# Altium PCB backpack.PcbDoc
Units mil, origin at the board's own origin, x right, y up, seen from the top; angles counter-clockwise.
Board outline 5575 x 3600 mil, 2 copper layers (Top Layer, Bottom Layer); 19 components, 19 nets, 108 pads, 3 vias.
Unrouted connection lines stored in the file: 1.
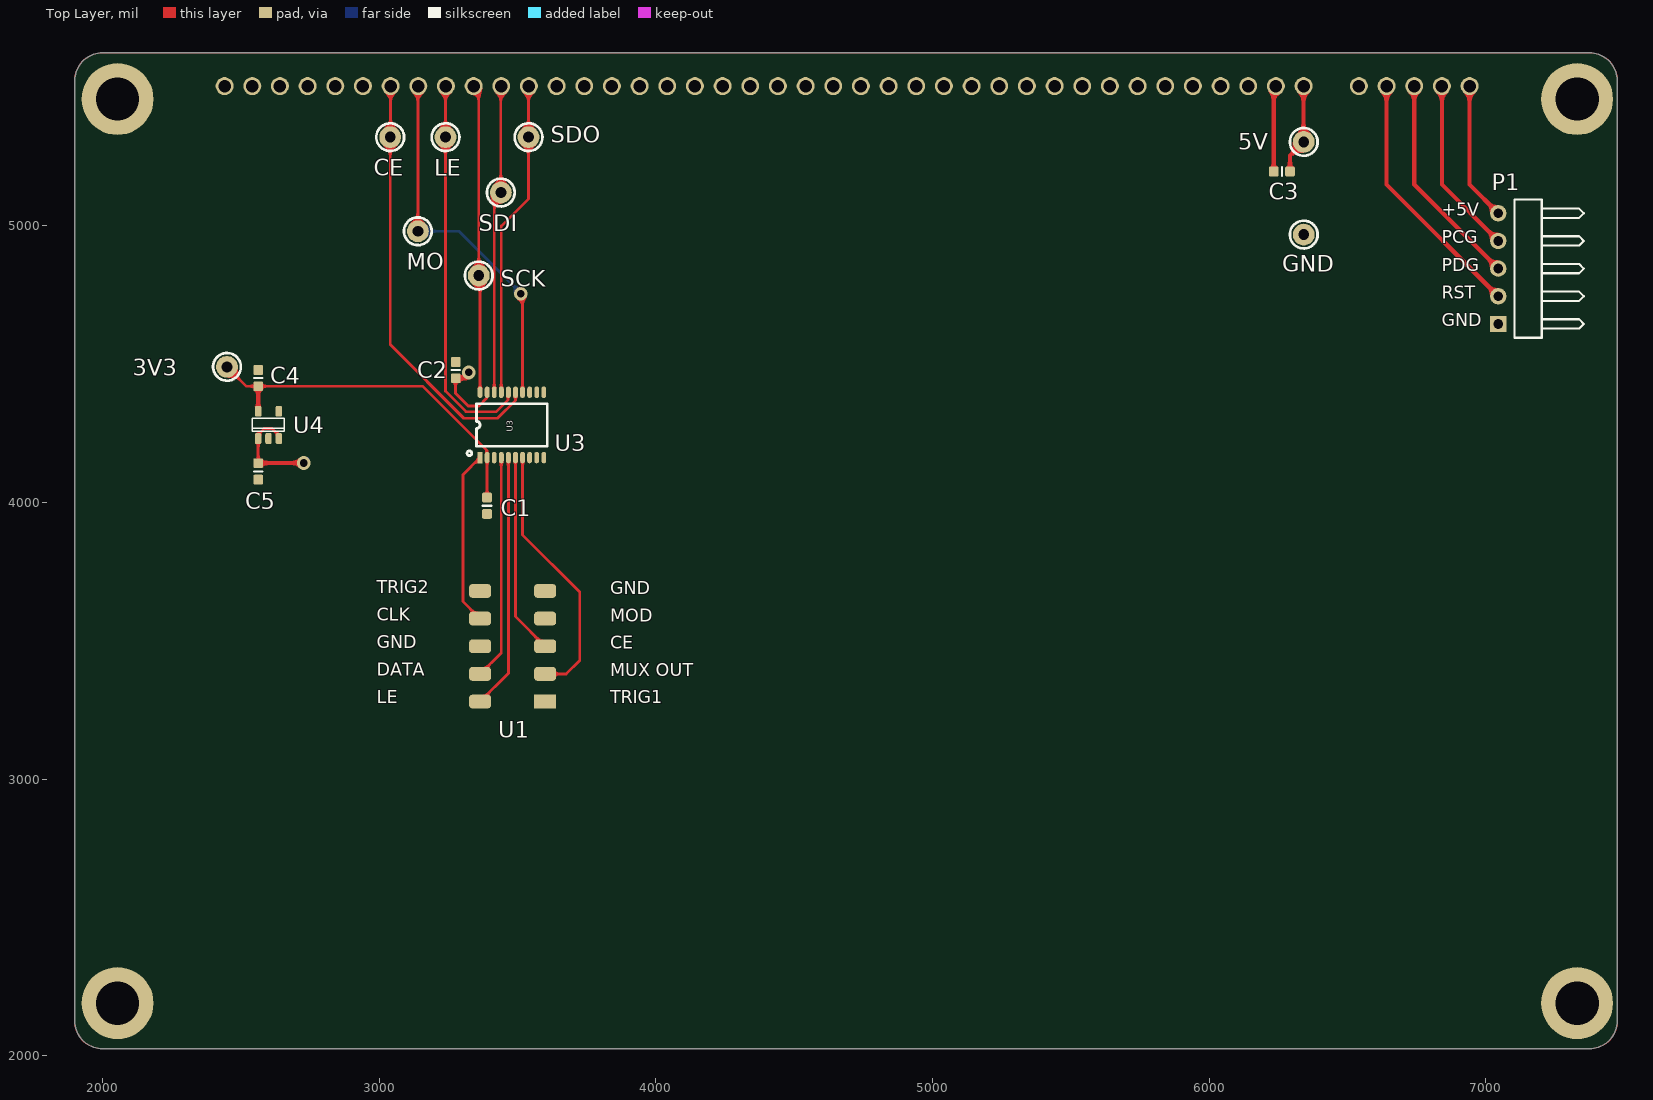
[diagram p0: Top Layer view]
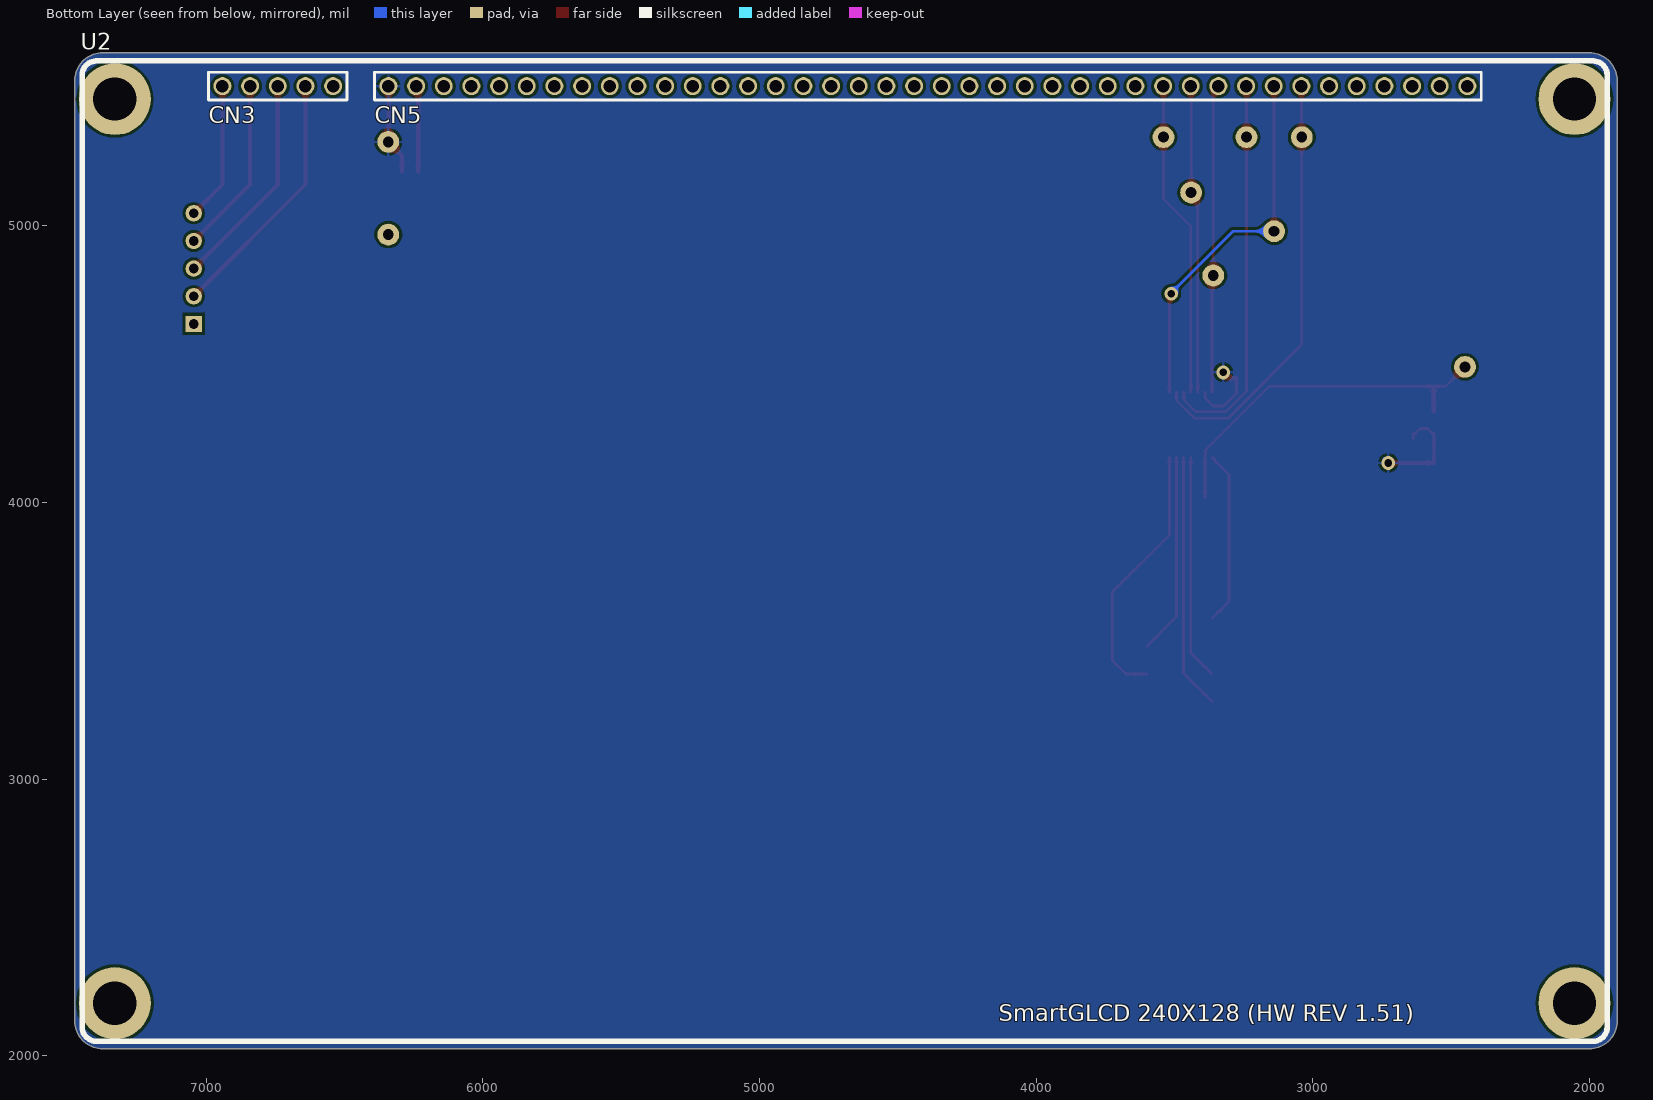
[diagram p1: Bottom Layer view, seen from below]
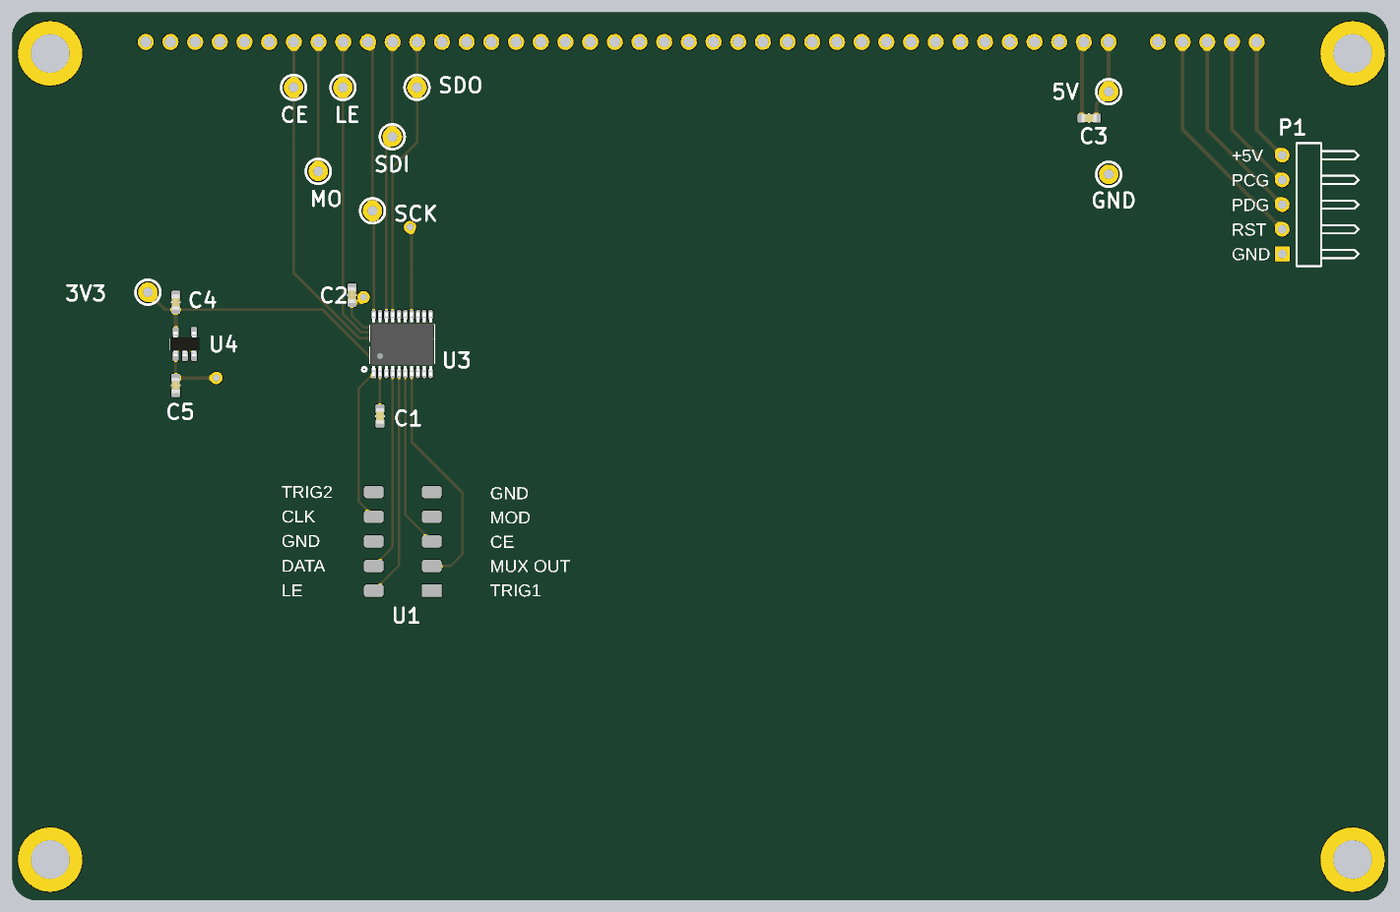
[diagram p2: 3D render of the assembled board from above, using the file's embedded part models]

## Layer stack, top to bottom
Top Solder: solder mask 0.4, Solder Resist, Dk 3.5
Top Layer: signal copper 1.4
Dielectric 1: dielectric 12.6, FR-4, Dk 4.8
Bottom Layer: signal copper 1.4
Bottom Solder: solder mask 0.4, Solder Resist, Dk 3.5

## Board outline
2850,5625 7375,5625 cw(c7375,5525) 7475,5525 7475,4750 7475,2125 cw(c7375,2125) 7375,2025 6725,2025 2000,2025 cw(c2000,2125) 1900,2125 1900,4950 1900,5525 cw(c2000,5525) 2000,5625 2850,5625

## Design rules (kind name [scope] priority, off if disabled: settings)
Clearance [All] p1: gap=10
PolygonConnect [All] p1: connectstyle=Relief reliefconductorwidth=10 reliefentries=4 polygonreliefangle="90 Angle" airgapwidth=10
RoutingVias [All] p1: holewidth=28 width=50 viastyle="Through Hole" minholewidth=28 minwidth=50 maxholewidth=28 maxwidth=50
SolderMaskExpansion [All] p1: expansion=4
UnpouredPolygon [All] p1: allowunpoured=FALSE
Width [All] p1: maxlimit=30 minlimit=10 preferedwidth=10
29 further rules are at their usual default settings.

## Classes and differential pairs
component class touchscreen: 3V3 5V C4 CE GND LE MO P1 SCK SDI SDO U2 U3 U4

## Components (designator, comment, footprint, x,y, rotation, side; value= is the part's Value field where it differs from the comment)
3V3 "TP-LOOP" TP-LOOP 2450,4490 r90 top
5V "TP-LOOP" TP-LOOP 6342,5303 r0 top
C1 "1uF" 0603-0.8MM 3390,3988 r90 top
C2 "1uF" 0603-0.8MM 3277,4478 r270 top
C3 "1uF" 0603-0.8MM 6263,5196 r0 top
C4 "1uF" 0603-0.8MM 2563,4449 r270 top
C5 "1uF" 0603-0.8MM 2563,4112 r90 top
CE "TP-LOOP" TP-LOOP 3040,5320 r0 top
GND "TP-LOOP" TP-LOOP 6342,4968 r0 top
LE "TP-LOOP" TP-LOOP 3240,5320 r0 top
MO "TP-LOOP" TP-LOOP 3140,4980 r0 top
P1 "Header 5H" HDR1X5H 7045,4645 r90 top
SCK "TP-LOOP" TP-LOOP 3360,4820 r0 top
SDI "TP-LOOP" TP-LOOP 3440,5120 r0 top
SDO "TP-LOOP" TP-LOOP 3540,5320 r0 top
U1 "MicroWire-Header" HDR2x5 3600,3280 r90 top
U2 "Smart_GLCD_240x128" GLCD_PANEL 7330,2190 r180 bottom
U3 "MAX3000E" TSSOP20 3480,4280 r90 top
U4 "3V3" SOT-23-5 2600,4280 r90 top

## Footprints (in the part's own frame and the unit in brackets; to place one, negate y for a bottom-side part, rotate by r counter-clockwise, add the part's x,y. Pads: shape width x height; smd on the part's side, far side on the other; paste and mask are expansions set on the pad)
0603-0.8MM [mm] "Chip Capacitor, Body 1.6x0.8mm, IPC High Density"
  rrect30% 0.9x0.9 smd: 1(-0.75,0) 2(0.75,0)
  silkscreen extent 0,-0.4 0,0.4, body extent -0.8,-0.4 0.8,0.4, height 0.8
GLCD_PANEL [mil]
  round 65 hole 45: 0(388.58,3314.57) 1(488.58,3314.57) 2(588.58,3314.57) 3(688.58,3314.57) 4(788.58,3314.57) 5(988.58,3314.57) 6(1088.58,3314.57) 7(1188.58,3314.57) 8(1288.58,3314.57) 9(1388.58,3314.57) 10(1488.58,3314.57) 11(1588.58,3314.57) 12(1688.58,3314.57) 13(1788.58,3314.57) 14(1888.58,3314.57) 15(1988.58,3314.57) 16(2088.58,3314.57) 17(2188.58,3314.57) 18(2288.58,3314.57) 19(2388.58,3314.57) 20(2488.58,3314.57) 21(2588.58,3314.57) 22(2688.58,3314.57) 23(2788.58,3314.57) 24(2888.58,3314.57) 25(2988.58,3314.57) 26(3088.58,3314.57) 27(3188.58,3314.57) 28(3288.58,3314.57) 29(3388.58,3314.57) 30(3488.58,3314.57) 31(3588.58,3314.57) 32(3688.58,3314.57) 33(3788.58,3314.57) 34(3888.58,3314.57) 35(3988.58,3314.57) 36(4088.58,3314.57) 37(4188.58,3314.57) 38(4288.58,3314.57) 39(4388.58,3314.57) 40(4488.58,3314.57) 41(4588.58,3314.57) 42(4688.58,3314.57) 43(4788.58,3314.57) 44(4888.58,3314.57)
  round 260 hole 157: M0(0,0) M1(5275.59,0) M2(5275.59,3268) M3(0,3268)
  silkscreen extent -118,-138 5394,3406
HDR1X5H [mm] "Connector; Header; 5 Position; Right Angle"
  rect 1.5x1.5 hole 0.9: 1(0,0)
  round 1.5 hole 0.9: 2(2.54,0) 3(5.08,0) 4(7.62,0) 5(10.16,0)
  silkscreen extent -1.27,-7.85 11.43,-1.5
HDR2x5 [mil]
  rect 50x80 smd: 1(0,0)
  rrect50% 50x80 smd: 2(0,235) 3(100,0) 4(100,235) 5(200,0) 6(200,235) 7(300,0) 8(300,235) 9(400,0) 10(400,235)
SOT-23-5 [mm]
  rrect50% 1x0.6 smd: 1(-1.25,0.95) 2(-1.25,0) 3(-1.25,-0.95) 4(1.25,-0.95) 5(1.25,0.95)
  silkscreen extent -0.6,-1.45 0.6,1.47, body extent -1.25,-1.5 1.25,1.5, height 1.05
TP-LOOP [mm] "Test Point Loop 0.040\" (1mm) Hole Diameter"
  round 2 hole 1: 0(0,0)
  silkscreen extent -1.27,-1.27 1.27,1.27
TSSOP20 [mm] "TSSOP 20-Pins"
  rect 1.05x0.45 smd: 1(-3,2.925)
  oval 1.05x0.45 smd: 2(-3,2.275) 3(-3,1.625) 4(-3,0.975) 5(-3,0.325) 6(-3,-0.325) 7(-3,-0.975) 8(-3,-1.625) 9(-3,-2.275) 10(-3,-2.925) 11(3,-2.925) 12(3,-2.275) 13(3,-1.625) 14(3,-0.975) 15(3,-0.325) 16(3,0.325) 17(3,0.975) 18(3,1.625) 19(3,2.275) 20(3,2.925)
  silkscreen extent -2.82,-3.25 1.95,4.12, body extent -3.3,-3.3 3.25,3.3, height 1.2

## Part data
3V3 5V: library part TP-00001
C1 C2 C3 C4 C5: library part CAP-00003, "Capacitor"
CE LE MO SCK SDI SDO: library part TP-00005
GND: library part TP-00002
P1: library part CON-00002, "Header, 5-Pin, Right Angle"
U1: library part CON-00001
U2: library part MISCP-00001
U3: library part MISC-00001
U4: library part VREG-00002

## Via types
v1: diameter 50, hole 28, Top Layer to Bottom Layer, 3 vias

## Nets (pads, with @x,y where several pads share a name; then routed paths per layer and width w, separated by ;. In a path a pad name is that pad's centre, name@x,y a point inside that pad or via, vN(x,y) a via of type N, cw(c..) or ccw(c..) an arc to the next point about the centre after c; other vN are vias at no path point)
3V3: 3V3.0 C1.2 C4.2 U3.2 U3.10 U4.5 | length 1325.4
  Top Layer w10: 3V3.0 2520.53,4419.47 C4.2 3158,4419.47 3388.7,4188.77 3388.7,4163.62 U3.2 ; C1.2 U3.2@3390,4161.46
  Top Layer w15: U4.5 2563,4329.61 C4.2
5V: 5V.0 C2.2 C3.2 C5.2 U2.5 U3.19 U4.1 U4.3 | length 1024.6
  Top Layer w10: C5.2 2562.6,4141.93 2562.6,4142.53 U4.1 2562.6,4244.6 2585,4267 2613.04,4267 2637,4243.04 U4.3@2637,4230.39 ; C2.2@3276,4441.47 3276,4394.28 3322.28,4348 3360.28,4348 3388.7,4376.42 3388.7,4396.38 U3.19
  Top Layer w15: C5.2@2562.6,4142.53 v1(2727.53,4142.53) ; C2.2 3314.47,4448.47 3336,4470 v1(3324,4470) ; C3.2 6292.53,5253.53 5V.0 6341.42,5303.58 U2.5
  Bottom Layer w15: v1(2727.53,4142.53) 2741,4156 v1@2741,4153 ; v1(3324,4470) v1@3328,4466
CE_3V3: U1.5 U3.6 | length 726.3
  Top Layer w10: U3.6 3492.8,3587.2 U1.5
CE_5V: CE.0 U2.38 U3.15 | length 1554.3
  Top Layer w10: CE.0 3040,4570 3306,4304 3428,4304 3492.8,4368.8 U3.15 ; CE.0@3041.42,5321.42 U2.38
  Top Layer w15: CE.0 CE.0@3041.42,5321.42
GND: C1.1 C2.1 C3.1 C4.1 C5.1 GND.0 P1.1 U1.6 U1.9 U2.4 U2.6 U3.11 U4.2 | length 324.7
  Top Layer w15: C3.1 6233.47,5496.62 U2.6 U2.6@6250.47,5495.51
LE_3V3: U1.2 U3.5 | length 924.2
  Top Layer w10: U1.2 3467.2,3382.2 U3.5
LE_5V: LE.0 U2.36 U3.16 | length 1405.6
  Top Layer w10: U2.36@3240,5503.15 LE.0 3240,4402 3314,4328 3423.72,4328 3465.47,4369.76 3465.47,4396.38 U3.16
  Top Layer w15: U2.36@3240,5503.15 U2.36
MO_3V3: U1.3 U3.7 | length 963.8
  Top Layer w10: U3.7 3518.39,3882.61 3725,3676 3725,3429 3676,3380 U1.3
MO_5V: MO.0 U2.37 U3.14 | length 1351.1
  Top Layer w10: MO.0 U2.37@3140,5503.15 ; v1(3512,4754) 3518,4748 3518,4398.5 U3.14
  Top Layer w15: U2.37@3140,5503.15 U2.37
  Bottom Layer w10: MO.0 3289,4980 3512,4757 v1(3512,4754)
NetP1_2: P1.2 U2.3 | length 926.7
  Top Layer w15: U2.3 6641.42,5148.58 P1.2
NetP1_3: P1.3 U2.2 | length 785.3
  Top Layer w15: U2.2 6741.42,5148.58 P1.3
NetP1_4: P1.4 U2.1 | length 643.9
  Top Layer w15: U2.1 6841.42,5148.58 P1.4
NetP1_5: P1.5 U2.0 | length 502.5
  Top Layer w15: U2.0 6941.42,5148.58 P1.5
SCK_3V3: U1.8 U3.1 | length 633.2
  Top Layer w10: U3.1 3303,4100.05 3303,3642 U1.8
SCK_5V: SCK.0 U2.35 U3.20 | length 1116.2
  Top Layer w10: U2.35@3360,5485.98 SCK.0 3364.84,4815.16 U3.20
  Top Layer w15: U2.35 U2.35@3360,5485.98
SDI_3V3: U3.3
SDI_5V: SDI.0 U2.34 U3.18 | length 1117
  Top Layer w10: U3.18 3416.02,5096.02 SDI.0 U2.34@3440,5503.15
  Top Layer w15: U2.34@3440,5503.15 U2.34
SDO_3V3: U1.4 U3.4 | length 813.6
  Top Layer w10: U1.4 3441.61,3456.61 U3.4
SDO_5V: SDO.0 U2.33 U3.17 | length 1147.8
  Top Layer w10: U3.17 3441.61,4998.61 3540,5097 SDO.0 U2.33@3540,5503.15
  Top Layer w15: U2.33@3540,5503.15 U2.33
pads on no net: U1.1 U1.7 U1.10 U2.7 U2.8 U2.9 U2.10 U2.11 U2.12 U2.13 U2.14 U2.15 U2.16 U2.17 U2.18 U2.19 U2.20 U2.21 U2.22 U2.23 U2.24 U2.25 U2.26 U2.27 U2.28 U2.29 U2.30 U2.31 U2.32 U2.39 U2.40 U2.41 U2.42 U2.43 U2.44 U2.M0 U2.M1 U2.M2 U2.M3 U3.8 U3.9 U3.12 U3.13 U4.4

## Polygon pours and split planes (outlines as drawn)
GND on Top Layer "Top GND" (solid, shelved, pour order 4): 2850,5625 7375,5625 cw(c7375,5525) 7475,5525 7475,4750 7475,2125 cw(c7375,2125) 7375,2025 6725,2025 2000,2025 cw(c2000,2125) 1900,2125 1900,4950 1900,5525 cw(c2000,5525) 2000,5625 2850,5625
5V on Bottom Layer "Bot 5V" (solid, pour order 6): 2850,5625 7375,5625 cw(c7375,5525) 7475,5525 7475,4750 7475,2125 cw(c7375,2125) 7375,2025 6725,2025 2000,2025 cw(c2000,2125) 1900,2125 1900,4950 1900,5525 cw(c2000,5525) 2000,5625 2850,5625

## Silkscreen, mask and mechanical layers (free items; w line width, h text height)
Top Overlay:
  text "+5V" at 6840,5020 h80
  text "PCG" at 6840,4920 h80
  text "PDG" at 6840,4820 h80
  text "RST" at 6840,4720 h80
  text "GND" at 6840,4620 h80
  text "TRIG2" at 2991,3656 h80
  text "GND" at 3836,3651 h80
  text "CLK" at 2991,3556.46 h80
  text "MOD" at 3836,3552.5 h80
  text "GND" at 2991,3456.93 h80
  text "CE" at 3836,3454 h80
  text "DATA" at 2991,3356.54 h80
  text "MUX OUT" at 3836,3355.5 h80
  text "LE" at 2991,3257 h80
  text "TRIG1" at 3836,3257 h80

## Dimensions
7375,5625 to 6725,2025 on Mechanical 1
1900,4950 to 7475,4750 on Mechanical 1

## Text inside footprints (layer, text, board x,y; h text height)
U2: Bottom Overlay "SmartGLCD 240X128 (HW REV 1.51)" at 4135,2125 h60; Bottom Overlay "CN3" at 6990,5370 h60; Bottom Overlay "CN5" at 6390,5370 h60